# Altium PCB PCBv1.PcbDoc
Units mm, origin at the board's own origin, x right, y up, seen from the top; angles counter-clockwise.
Board outline 125 x 105 mm, 2 copper layers (Top Layer, Bottom Layer); 40 components, 19 nets, 89 pads, 0 vias.
Unrouted connection lines stored in the file: 12.
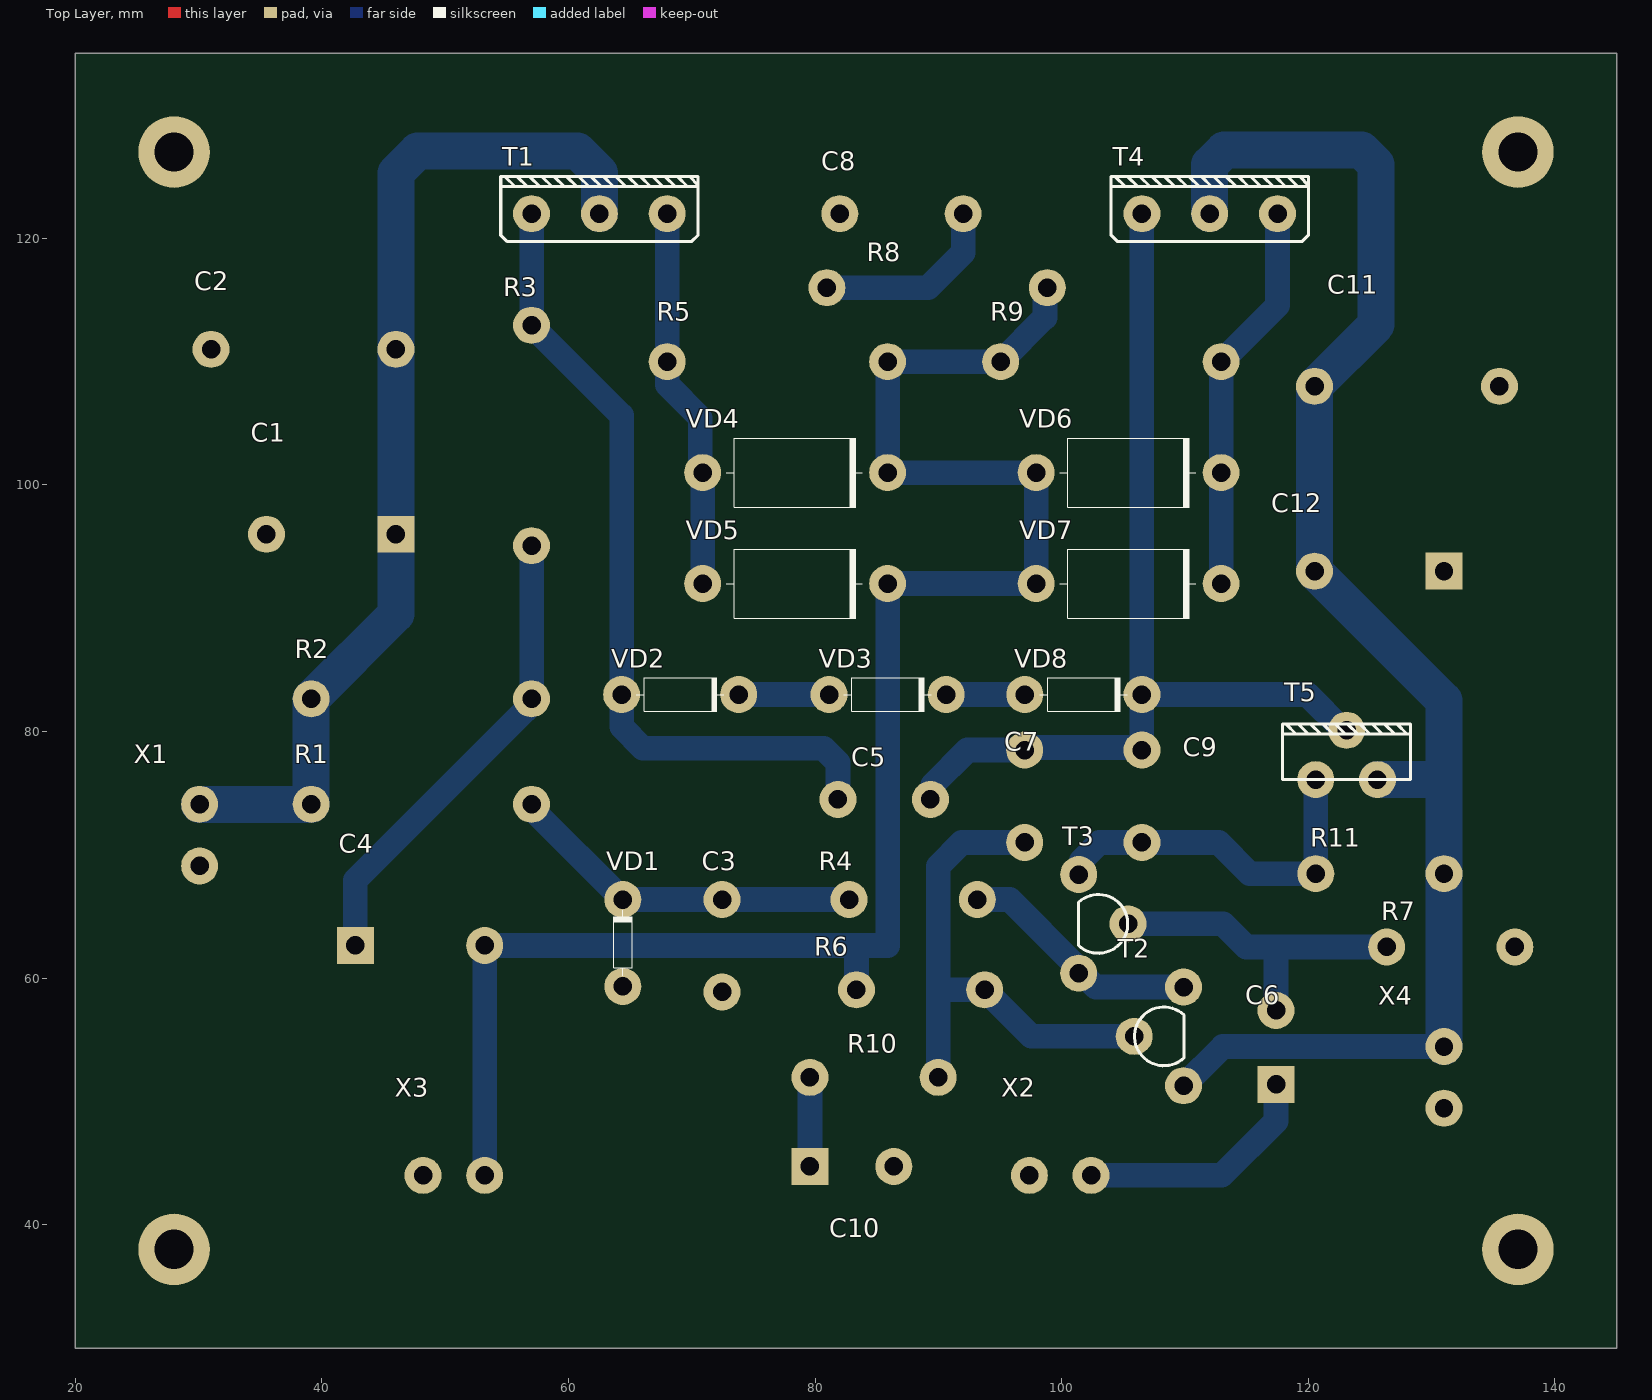
[diagram p0: Top Layer view]
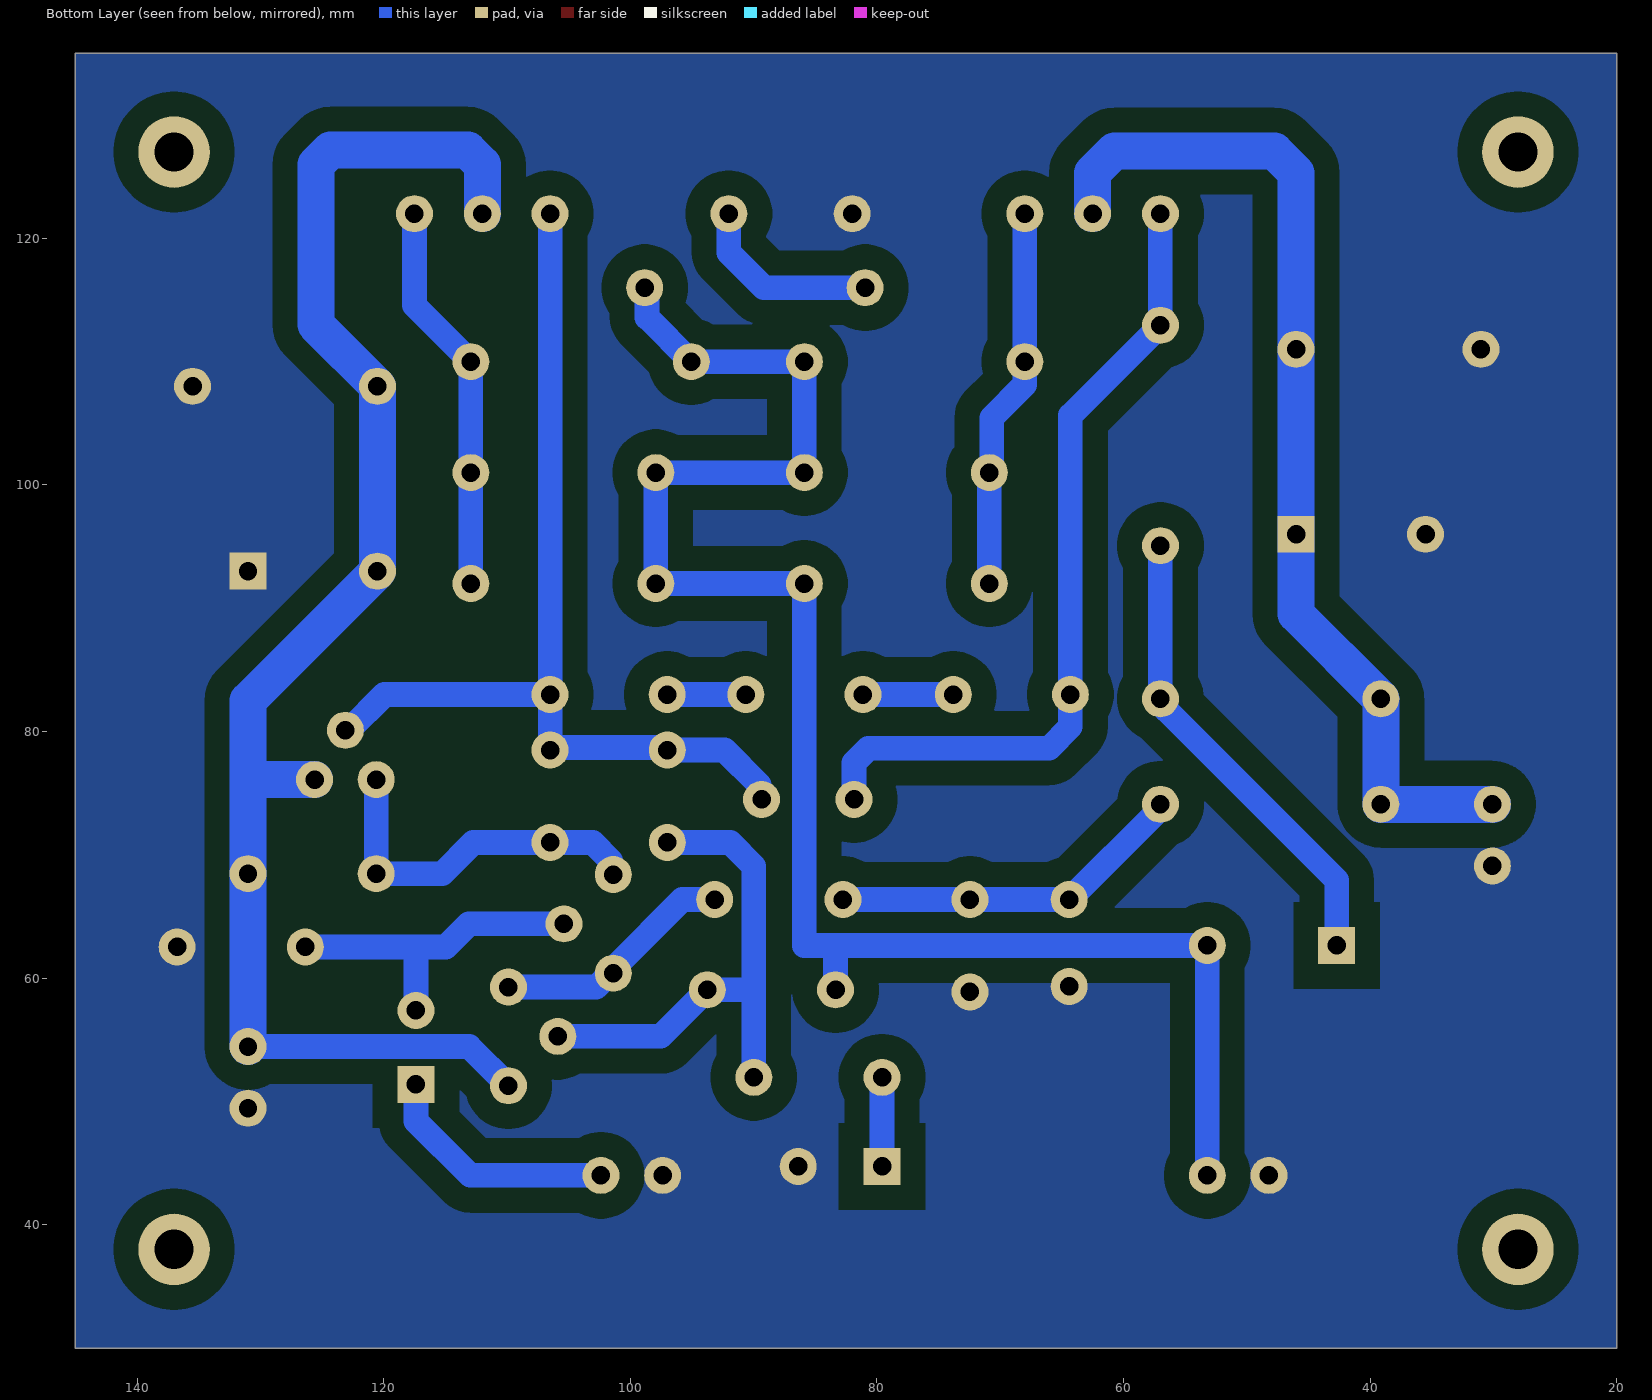
[diagram p1: Bottom Layer view, seen from below]
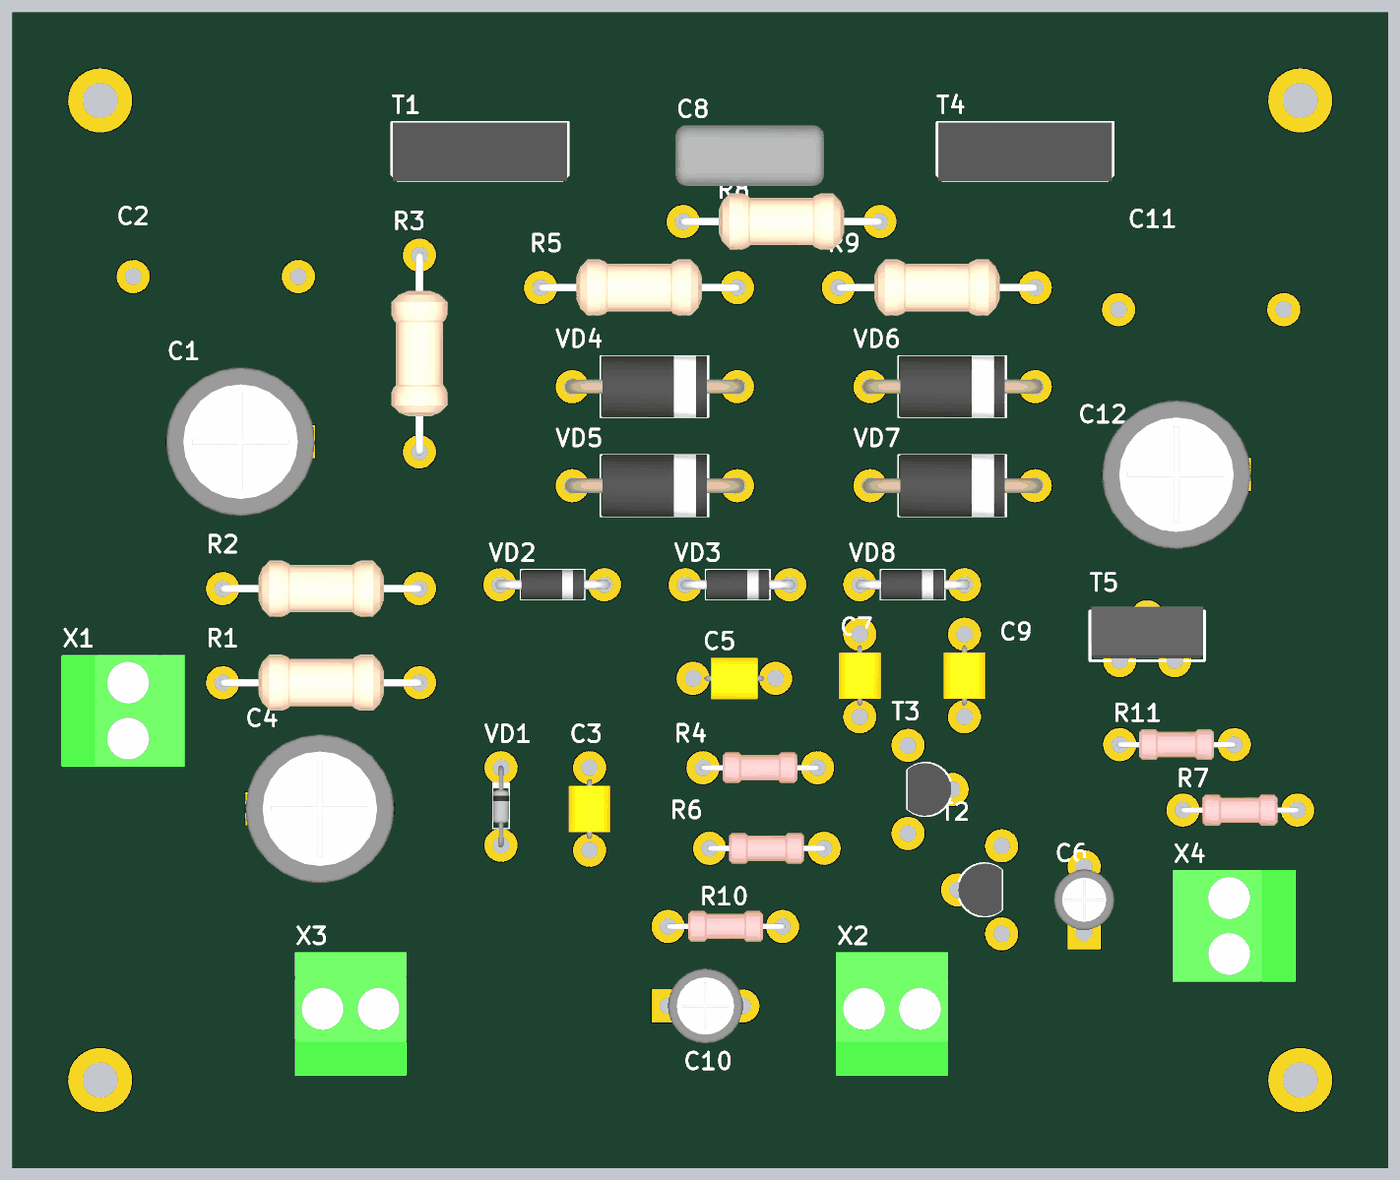
[diagram p2: 3D render of the assembled board from above, using the file's embedded part models]

## Layer stack, top to bottom
Top Solder: solder mask 0.0102, Solder Resist, Dk 3.5
Top Layer: signal copper 0.0356
Dielectric 1: dielectric 0.32, FR-4, Dk 4.8
Bottom Layer: signal copper 0.0356
Bottom Solder: solder mask 0.0102, Solder Resist, Dk 3.5

## Board outline
20,30 20,135 145,135 145,30

## Design rules (kind name [scope] priority, off if disabled: settings)
Clearance Clearance_6 [InNamedPolygon('GND_L02_P001')] p1: gap=0.254 ignorepadtopadclearanceinfootprint=FALSE except(0: Arc-Hole Track-Hole SMDPad-Hole THPad-Hole Via-Hole Fill-Hole Poly-Hole Region-Hole Text-Hole; 2: Arc-Fill Arc-Poly Arc-Region Track-Fill Track-Poly Track-Region SMDPad-Fill SMDPad-Poly SMDPad-Region THPad-Fill THPad-Poly THPad-Region)
Clearance Clearance_5 [InNamedPolygon('GND_L02_P000')] p2: gap=0.254 ignorepadtopadclearanceinfootprint=FALSE except(0: Arc-Hole Track-Hole SMDPad-Hole THPad-Hole Via-Hole Fill-Hole Poly-Hole Region-Hole Text-Hole; 2: Arc-Fill Arc-Poly Arc-Region Track-Fill Track-Poly Track-Region SMDPad-Fill SMDPad-Poly SMDPad-Region THPad-Fill THPad-Poly THPad-Region)
Clearance Clearance_4 [InNamedPolygon('GND_L02_P000')] p3: gap=0.254 ignorepadtopadclearanceinfootprint=FALSE except(0: Arc-Hole Track-Hole SMDPad-Hole THPad-Hole Via-Hole Fill-Hole Poly-Hole Region-Hole Text-Hole; 1: Arc-Fill Arc-Poly Arc-Region Track-Fill Track-Poly Track-Region)
Clearance Clearance_3 [InNamedPolygon('GND_L02_P000')] p4: gap=0.254 ignorepadtopadclearanceinfootprint=FALSE except(0: Arc-Hole Track-Hole SMDPad-Hole THPad-Hole Via-Hole Fill-Hole Poly-Hole Region-Hole Text-Hole; 2: Arc-Fill Arc-Poly Arc-Region Track-Fill Track-Poly Track-Region)
Clearance Clearance_2 [InNamedPolygon('GND_L02_P000')] p5: gap=0.254 ignorepadtopadclearanceinfootprint=FALSE except(0: Arc-Hole Track-Hole SMDPad-Hole THPad-Hole Via-Hole Fill-Hole Poly-Hole Region-Hole Text-Hole; 2: Arc-Fill Arc-Poly Arc-Region Track-Fill Track-Poly Track-Region)
Clearance Clearance_1 [InNamedPolygon('GND_L02_P000')] p6: gap=0.254 ignorepadtopadclearanceinfootprint=FALSE except(0: Arc-Hole Track-Hole SMDPad-Hole THPad-Hole Via-Hole Fill-Hole Poly-Hole Region-Hole Text-Hole; 1: Arc-Fill Arc-Poly Arc-Region Track-Fill Track-Poly Track-Region)
Clearance [All] p7: gap=0.254 ignorepadtopadclearanceinfootprint=FALSE except(0: Arc-Hole Track-Hole SMDPad-Hole THPad-Hole Via-Hole Fill-Hole Poly-Hole Region-Hole Text-Hole)
Height [All] p1: minheight=0 maxheight=50 prefheight=12.7
HoleSize [All] p1: absolutevalues=TRUE maxlimit=5 minlimit=0.025 maxpercent=80.000 minpercent=20.000
PolygonConnect PolygonConnect_3 [All vs IsNamedPolygon('GND_L02_P001')] p1: connectstyle=Direct reliefconductorwidth=0.254 reliefentries=4 polygonreliefangle="90 Angle" airgapwidth=0.254
PolygonConnect PolygonConnect_2 [All vs IsNamedPolygon('GND_L02_P001')] p2: connectstyle=Direct reliefconductorwidth=0.254 reliefentries=4 polygonreliefangle="90 Angle" airgapwidth=0.254
PolygonConnect PolygonConnect_1 [All vs IsNamedPolygon('GND_L02_P000')] p3: connectstyle=Direct reliefconductorwidth=0.254 reliefentries=4 polygonreliefangle="90 Angle" airgapwidth=0.254
PolygonConnect [All] p4: connectstyle=Relief reliefconductorwidth=0.254 reliefentries=4 polygonreliefangle="90 Angle" airgapwidth=0.254
RoutingVias [All] p1: holewidth=0.711 width=1.27 viastyle="Through Hole" minholewidth=0.711 minwidth=1.27 maxholewidth=0.711 maxwidth=1.27
SilkToSolderMaskClearance [IsPad] p1: minsilkscreentomaskgap=0.1 clearancetoexposedcopper=TRUE
SolderMaskExpansion [All] p1: expansion=0.102 istentingtop=FALSE
Width [All] p1: maxlimit=5 minlimit=0.254 preferedwidth=0.254
27 further rules are at their usual default settings.

## Components (designator, comment, footprint, x,y, rotation, side; value= is the part's Value field where it differs from the comment)
C1 "220uF/100V" "Cap 220U/100V" 40.75,96 r180 top
C2 "1uF/63V" "Cap 1u/63V" 38.5,111 r0 top
C3 "220nF" "Cap 220nF" 72.45,65.375 r270 top
C4 "220uF/50V" "Cap 220U/100V" 47.95,62.65 r0 top
C5 "470nF" "Cap 470n" 88.35,74.494 r180 top
C6 "10uF/25V" "Cap 10u/25V" 117.375,54.375 r90 top
C7 "220pF" "Cap 220p" 96.994,72 r90 top
C8 "100nF/100V" "Cap 100n/100V" 87,122 r0 top
C9 "100pF/100V" "Cap 100p" 106.5,72 r90 top
C10 "470uF/10V" "Cap 470u/10V" 82.975,44.725 r0 top
C11 "1uF/63V" "Cap 1u/63V" 128,108 r180 top
C12 "220uF/100V" "Cap 220U/100V" 125.75,93 r180 top
R1 "Resistor 1W" "Res 1W" 48.075,74.1 r180 top
R2 "Resistor 1W" "Res 1W" 48.075,82.65 r180 top
R3 "Resistor 1W" "Res 1W" 57,104 r90 top
R4 "Resistor 0.25W" "Res 0.25W" 87.925,66.375 r180 top
R5 "Resistor 1W" "Res 1W" 76.95,110 r180 top
R6 "Resistor 0.25W" "Res 0.25W" 88.525,59.05 r180 top
R7 "Resistor 0.25W" "Res 0.25W" 131.525,62.525 r180 top
R8 "Resistor 1W" "Res 1W" 89.875,116 r0 top
R9 "Resistor 1W" "Res 1W" 104,110 r180 top
R10 "Resistor 0.25W" "Res 0.25W" 84.8,51.95 r0 top
R11 "Resistor 0.25W" "Res 0.25W" 125.775,68.475 r180 top
T1 "TIP142" TO-247 62.5,122 r0 top
T2 "BC556B" TO-92-A 107.875,55.275 r270 top
T3 "BC556B" TO-92-A 103.375,64.4 r90 top
T4 "TIP147" TO-247 112,122 r0 top
T5 "BD241C" TO-220 123.1,78.1 r0 top
VD1 "ZPD12" DO-35 64.4,62.85 r90 top
VD2 "Diode 1N4001" DO-41 64.3,83 r0 top
VD3 "Diode 1N4001" DO-41 81.125,83 r0 top
VD4 "Diode BY399" DO-27 78.375,101 r0 top
VD5 "Diode BY399" DO-27 78.375,92 r0 top
VD6 "Diode BY399" DO-27 105.425,101 r0 top
VD7 "Diode BY399" DO-27 105.425,92 r0 top
VD8 "Diode 1N4001" DO-41 97,83 r0 top
X1 "Connector, 2pin, 9.53mm, 300VAC, 25A" EHK2V-02P 30.075,74.1 r270 top
X2 "Connector, 2pin, 9.53mm, 300VAC, 25A" EHK2V-02P 97.375,44 r0 top
X3 "Connector, 2pin, 9.53mm, 300VAC, 25A" EHK2V-02P 48.2,44 r0 top
X4 "Connector, 2pin, 9.53mm, 300VAC, 25A" EHK2V-02P 131,49.45 r90 top

## Footprints (in the part's own frame and the unit in brackets; to place one, negate y for a bottom-side part, rotate by r counter-clockwise, add the part's x,y. Pads: shape width x height; smd on the part's side, far side on the other; paste and mask are expansions set on the pad)
"Cap 1u/63V" [mm]
  round 3 hole 1.5: 1(-7.5,0) 2(7.5,0)
  body extent -9,-4 9,4, height 15
"Cap 10u/25V" [mm]
  rect 3x3 hole 1.5: 1(-3,0)
  round 3 hole 1.5: 2(3,0)
  body extent -2.75,-2.75 2.75,2.75, height 15
"Cap 100n/100V" [mm]
  round 3 hole 1.5: 1(-5,0) 2(5,0)
  body extent -6.75,-2.75 6.75,2.75, height 14
"Cap 100p" [mm]
  round 3 hole 1.5: 1(-1,0) 2(6.5,0)
  body extent 0,-1.91 5.5,1.91, height 6.2
"Cap 220nF" [mm]
  round 3 hole 1.5: 1(-1,0) 2(6.5,0)
  body extent 0,-1.91 5.5,1.91, height 5.2
"Cap 220p" [mm]
  round 3 hole 1.5: 1(-1,0) 2(6.5,0)
  body extent 0,-1.91 5.5,1.91, height 6.2
"Cap 220U/100V" [mm]
  rect 3x3 hole 1.5: 1(-5.25,0)
  round 3 hole 1.5: 2(5.25,0)
  body extent -6.75,-6.75 6.75,6.75, height 29
"Cap 470n" [mm]
  round 3 hole 1.5: 1(-1,0) 2(6.5,0)
  body extent 0,-1.91 5.5,1.91, height 6.2
"Cap 470u/10V" [mm]
  rect 3x3 hole 1.5: 1(-3.4,0)
  round 3 hole 1.5: 2(3.4,0)
  body extent -3.4,-3.4 3.4,3.4, height 15
DO-27 [mm]
  round 3 hole 1.5: 1(-7.5,0) 2(7.5,0)
  silkscreen extent -5.6,-2.8 5.45,2.8, body extent -8.15,-2.81 8.15,2.81, height 5.59
DO-35 [mm]
  round 3 hole 1.5: 1(-3.525,0) 2(3.525,0)
  silkscreen extent -2.65,-0.8 2.68,0.75, body extent -3.72,-0.75 3.72,0.76, height 3.51
DO-41 [mm]
  round 3 hole 1.5: 1(0,0) 2(9.5,0)
  silkscreen extent 1.2,-1.38 8.3,1.38, body extent -0.39,-1.35 9.99,1.35, height 2.83
EHK2V-02P [mm]
  round 3 hole 1.5: 1(0,0) 2(5,0)
  body extent -2.54,-5.6 7.62,5.6, height 20
"Res 0.25W" [mm]
  round 3 hole 1.5: 1(-5.225,0) 2(5.175,0)
  body extent -5.42,-1.4 5.42,1.4, height 3.89
"Res 1W" [mm]
  round 3 hole 1.5: 1(-8.925,0) 2(8.95,0)
  body extent -9.24,-2.55 9.24,2.55, height 6.15
TO-92-A [mm]
  round 3 hole 1.5: 1(4,2) 2(0,-2) 3(-4,2)
  silkscreen extent -2.38,-1.97 2.38,2.02, body extent -2.4,-1.92 2.4,2.01, height 10
TO-220 [mm]
  round 3 hole 1.5: 1(-2.5,-2) 2(0,2) 3(2.5,-2)
  silkscreen extent -5.2,-2 5.2,2.5, body extent -5.08,-1.78 5.08,2.92, height 26.87
TO-247 [mm]
  round 3 hole 1.5: 1(-5.5,0) 2(0,0) 3(5.5,0)
  silkscreen extent -8,-2.25 8,3, body extent -7.9,-2.3 7.9,3, height 26.1

## Part data
C1 C12: library part "Capacitor 220uF 100V", Published=18.05.2010, Publisher="Andrew Danich", Type=Конденсатор
C2 C11: library part "Capacitor 1uF 63V", Published=18.05.2010, Publisher="Andrew Danich", Type=Конденсатор
C3: library part "Capacitor 220nF", Published=18.05.2010, Publisher="Andrew Danich", Type=Конденсатор
C4: library part "Capacitor 220uF 50V", Published=18.05.2010, Publisher="Andrew Danich", Type=Конденсатор
C5: library part "Capacitor 470nF", Published=18.05.2010, Publisher="Andrew Danich", Type=Конденсатор
C6: library part "Capacitor 10uF 25V", Published=18.05.2010, Publisher="Andrew Danich", Type=Конденсатор
C7: library part "Capacitor 220pF", Published=18.05.2010, Publisher="Andrew Danich", Type=Конденсатор
C8: library part "Capacitor 100nF 100V", Published=18.05.2010, Publisher="Andrew Danich", Type=Конденсатор
C9: library part "Capacitor 100pF 100V", Published=18.05.2010, Publisher="Andrew Danich", Type=Конденсатор
C10: library part "Capacitor 470uF 10V", Published=18.05.2010, Publisher="Andrew Danich", Type=Конденсатор
X1 X2 X3 X4: library part Connector_EHK2V-02P, CurrentMax=25A, Manufacturer="Dinkle Enterprise", PartNumber=EHK2V-02P, VoltageMax=300VAC, CommentText="\"Разъем\"", Datasheet=https://pcbdesigner.ru/downloads/connectors/EHK2V-XXP-DINKLE.pdf, Multichannel=2pin, Pitch=9.53mm, TypeConnector=Connector, ValueManufacturerPartNumber="Connector, 2pin, 9.53mm, 300VAC, 25A"
R1 R2 R3 R4 R5 R6 R7 R8 R9 R10 R11: Published=24.03.2010, Publisher="Andrew Danich", Type=Резистор
VD1: Published=20.05.2013, Publisher="Andrew Danich", Type=Стабилитрон
VD2 VD3 VD4 VD5 VD6 VD7 VD8: Published=18.05.2010, Publisher="Andrew Danich", Type=Диод

## Free pads (board coordinates)
  round 5.8 hole 3.2: 1(28,127) 2(137,127) 3(137,38) 4(28,38)

## Nets (pads, with @x,y where several pads share a name; then routed paths per layer and width w, separated by ;. In a path a pad name is that pad's centre, name@x,y a point inside that pad or via, vN(x,y) a via of type N, cw(c..) or ccw(c..) an arc to the next point about the centre after c; other vN are vias at no path point)
GND: C1.2 C2.1 C3.2 C8.1 C10.2 C11.1 C12.1 R7.1 VD1.1 X1.2 X2.1 X3.1 X4.1
NetC1_1: C1.1 C2.2 R1.2 R2.2 T1.2 X1.1 | length 84.4
  Bottom Layer w3: X1.1 R1.2 R2.2 46,89.525 C1.1 C2.2 46,125.318 47.757,127.075 60.743,127.075 62.5,125.318 T1.2
NetC3_1: C3.1 R1.1 R4.2 VD1.2 | length 29.1
  Bottom Layer w2: R1.1 57.191,73.909 57.191,73.584 VD1.2 C3.1 R4.2
NetC4_1: C4.1 R2.1 R3.1 | length 38.3
  Bottom Layer w2: C4.1 42.7,67.925 56.5,81.725 56.5,81.879 57,82.379 R3.1
NetC4_2: C4.2 R5.1 R6.2 R8.2 R9.2 VD4.2 VD5.2 VD6.1 VD7.1 X3.2 | length 143.1
  Bottom Layer w2: X3.2 C4.2 83.35,62.65 ; R6.2 83.35,62.65 ; R8.2 98.634,115.809 98.634,113.584 R9.2 R5.1 VD4.2 VD6.1 VD7.1 VD5.2 85.875,62.65 83.35,62.65
NetC5_1: C5.1 C7.2 C9.2 T4.1 T5.2 VD8.2 | length 80.9
  Bottom Layer w2: C5.1@89.023,74.82 89.406,74.82 89.541,74.956 89.541,75.685 92.356,78.5 C7.2 97.185,78.691 97.892,78.691 97.901,78.7 106.029,78.7 106.229,78.5 C9.2 VD8.2 ; T4.1 106.5,86.25 VD8.2 ; T5.2 122.829,80.1 119.929,83 VD8.2
NetC5_2: C5.2 R3.2 T1.1 VD2.1 | length 66.4
  Bottom Layer w2: T1.1 R3.2 57,112.925 64.3,105.625 64.3,80.375 66.025,78.65 80.678,78.65 81.85,77.478 C5.2
NetC6_1: C6.1 X2.2 | length 19.8
  Bottom Layer w2: X2.2 112.975,44 117.375,48.4 C6.1
NetC6_2: C6.2 R7.2 T3.2 | length 26.9
  Bottom Layer w2: T3.2 113.075,64.4 114.95,62.525 117.376,62.525 ; C6.2 117.376,62.525 ; R7.2 117.376,62.525
NetC7_1: C7.1 R6.1 R10.2 T2.2 | length 42.4
  Bottom Layer w2: R10.2 89.975,59.05 ; R6.1@93.7,59.05 89.975,59.05 ; R6.1 97.525,55.275 T2.2 ; C7.1 91.9,71 89.975,69.075 89.975,59.05
NetC8_2: C8.2 R8.1 | length 15.4
  Bottom Layer w2: R8.1 89.15,116 92,118.85 C8.2
NetC9_1: C9.1 R11.2 T3.1 T5.1 | length 29.5
  Bottom Layer w2: T3.1 101.566,68.591 101.566,69.52 103.047,71 112.725,71 115.25,68.475 R11.2 T5.1
NetC10_1: C10.1 R10.1 | length 7.2
  Bottom Layer w2: C10.1 R10.1
NetC11_2: C11.2 C12.2 R11.1 T2.1 T4.2 T5.3 X4.2 | length 124.2
  Bottom Layer w2: T2.1 113.05,54.45 X4.2
  Bottom Layer w3: T4.2 112,125.978 113.172,127.15 124.328,127.15 125.5,125.978 125.5,113 C11.2 C12.2 131,82.5 131,76.1 ; T5.3 131,76.1 ; X4.2 R11.1 131,76.1
NetR4_1: R4.1 T2.3 T3.3 | length 19.9
  Bottom Layer w2: R4.1 95.775,66.375 101.184,60.966 101.184,60.591 T3.3 101.646,60.4 102.771,59.275 T2.3
NetR5_2: R5.2 T1.3 VD4.1 VD5.1 | length 31.2
  Bottom Layer w2: T1.3 R5.2 68,108.146 70.684,105.462 70.684,101.191 VD4.1 VD5.1
NetR9_1: R9.1 T4.3 VD6.2 VD7.2 | length 31.9
  Bottom Layer w2: VD7.2 VD6.2 R9.1 117.5,114.575 T4.3
NetVD2_2: VD2.2 VD3.1 | length 7.3
  Bottom Layer w2: VD2.2 VD3.1
NetVD3_2: VD3.2 VD8.1 | length 6.4
  Bottom Layer w2: VD3.2 VD8.1

## Polygon pours and split planes (outlines as drawn)
GND on Bottom Layer "GND_L02_P001" (solid, remove dead copper, pour order 1): 20,30 20,135 145,135 145,30

## Silkscreen, mask and mechanical layers (free items; w line width, h text height)
Mechanical 1:
  lines w0.1: 20,30 141,30 145,34 145,135 20,135 20,30